# Altium PCB NRF24L01_PA.PcbDoc
Units mil, origin at the board's own origin, x right, y up, seen from the top; angles counter-clockwise.
Board outline 865.03 x 605.03 mil, 4 copper layers (Top Layer, Internal Plane 1, Signal Layer 1, Bottom Layer), stack 29.965 mil thick; 31 components, 23 nets, 111 pads, 55 vias.
Unrouted connection lines stored in the file: 1.
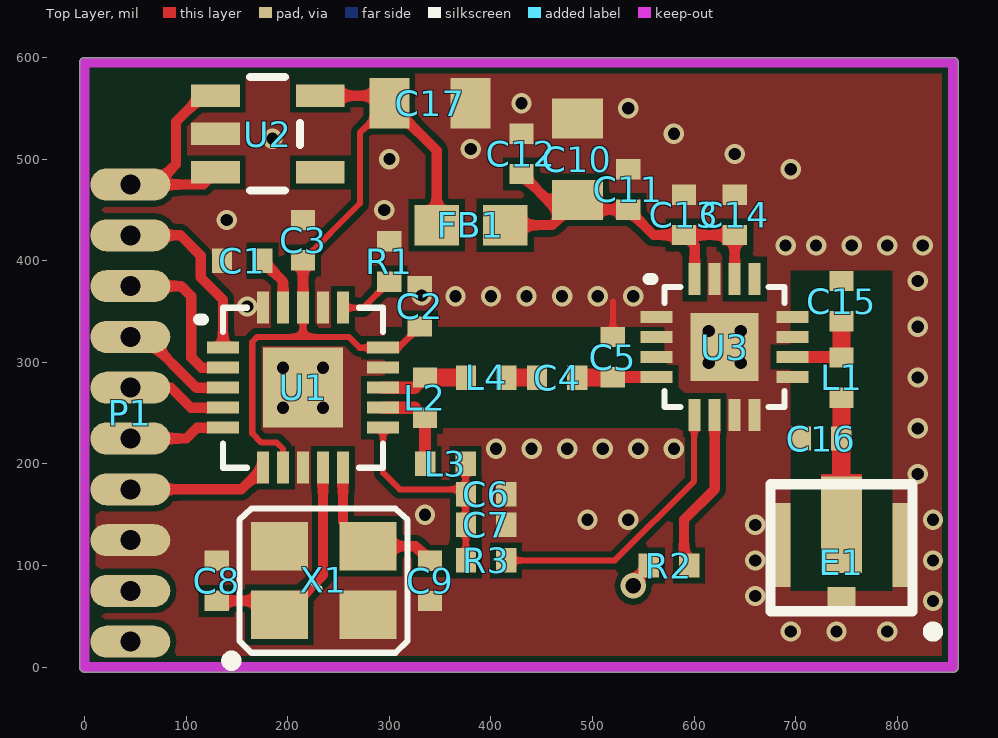
[diagram p0: Top Layer view]
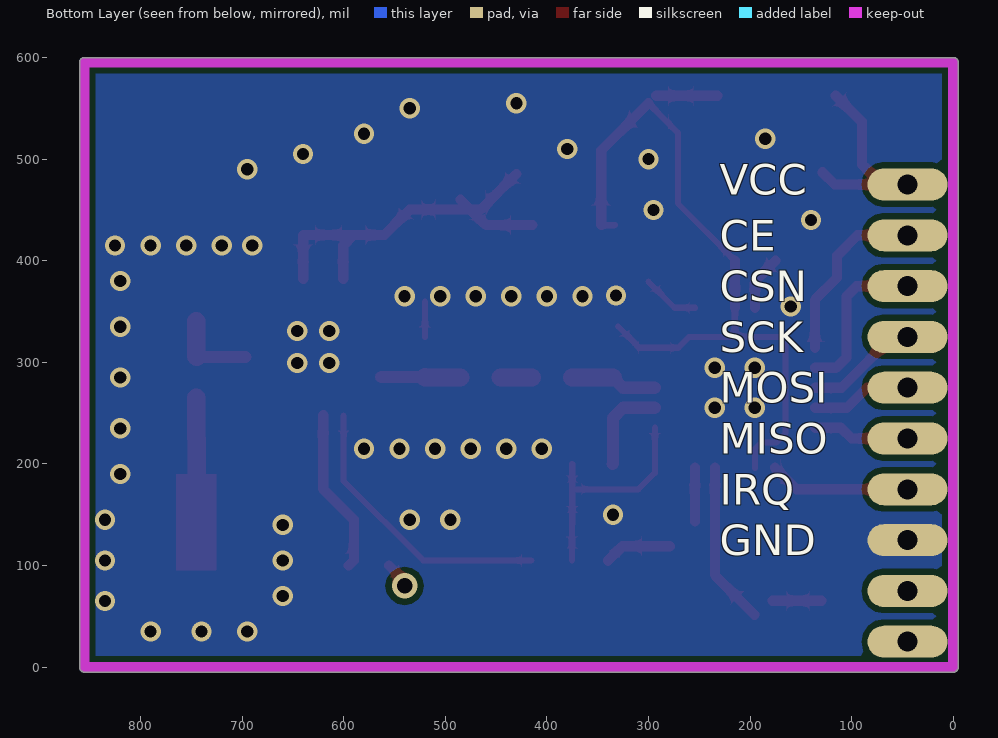
[diagram p1: Bottom Layer view, seen from below]
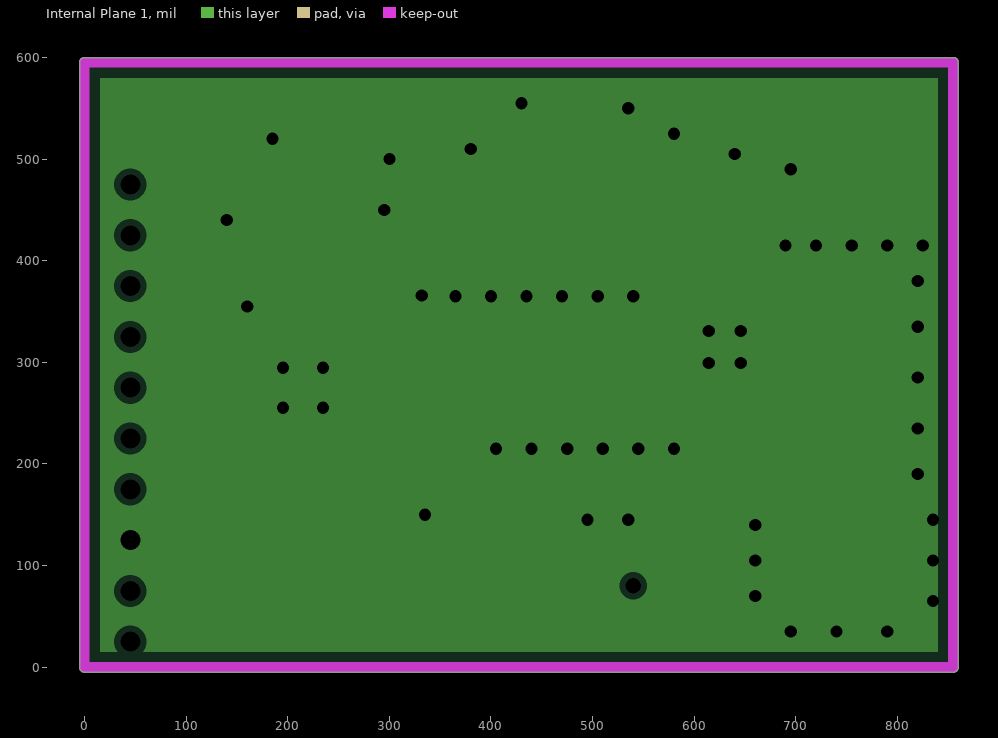
[diagram p2: Internal Plane 1, clearances drawn from the general rule]
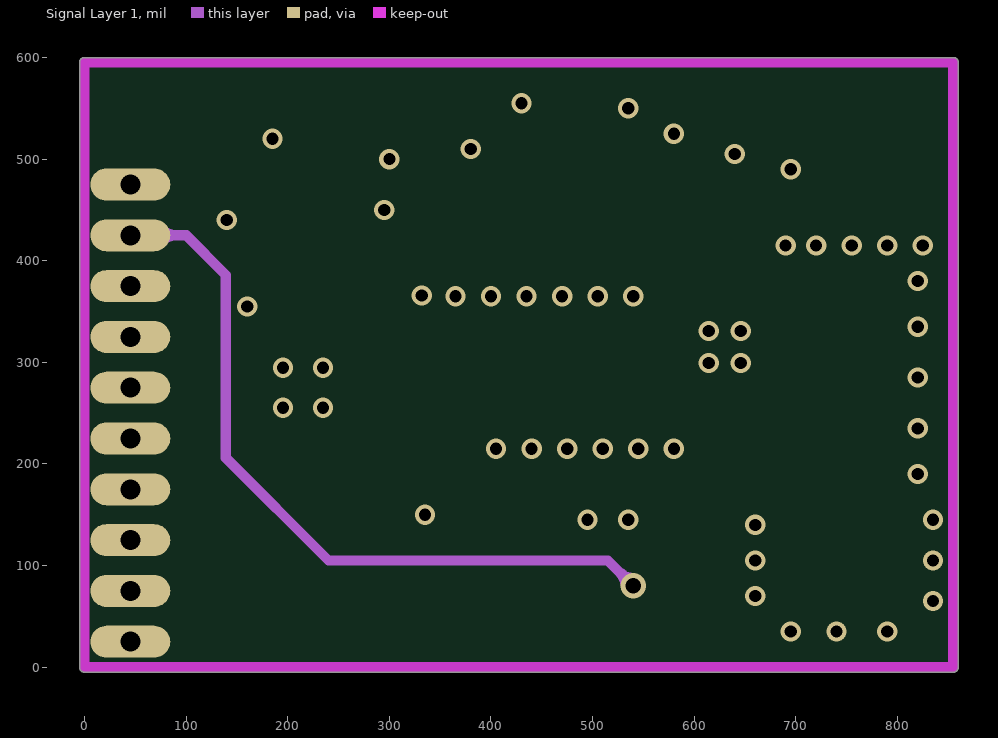
[diagram p3: Signal Layer 1]

## Layer stack, top to bottom
Top Solder: solder mask 0.4, Solder Resist, Dk 3.5
Top Layer: signal copper 1.4
Dielectric1: prepreg 5, FR-4, Dk 4.2
Internal Plane 1: plane copper 0.7087
Dielectric3: core 15.748, Dk 4.2
Signal Layer 1: signal copper 0.7087
Dielectric2: prepreg 5, Dk 4.2
Bottom Layer: signal copper 1.4
Bottom Solder: solder mask 0.4, Solder Resist, Dk 3.5

## Board outline
-5.02,0 ccw(c0,0) 0,-5.02 855,-5.02 ccw(c855,0) 860.02,0 860.02,595 ccw(c855,595) 855,600.01 0,600.01 ccw(c0,595) -5.02,595

## Design rules (kind name [scope] priority, off if disabled: settings)
Clearance [All] p1: gap=6 ignorepadtopadclearanceinfootprint=FALSE except(0: Arc-Hole Track-Hole SMDPad-Hole THPad-Hole Via-Hole Fill-Hole Poly-Hole Region-Hole Text-Hole)
FabricationTestpoint [(IsPad And (OnTopLayer Or OnBottomLayer))] p1: side=3 testpointundercomponent=TRUE minsize=40 maxsize=100 preferedsize=60 minholesize=0 maxholesize=40 preferedholesize=32 testpointgrid=1 allowsidetop=TRUE allowsidebottom=TRUE usegrid=TRUE gridtolerance=0.01
PlaneClearance [All] p1: clearance=6
PlaneConnect [All] p1: planeconnectstyle=NoConnect reliefexpansion=20 reliefentries=4 reliefconductorwidth=10 reliefairgap=10
PolygonConnect [All] p1: connectstyle=Direct reliefconductorwidth=10 reliefentries=4 polygonreliefangle="90 Angle" airgapwidth=10
RoomDefinition NRF24L01_PA [InComponentClass('NRF24L01_PA')] p1: confinementstyle=ConfineIn formatcopy=TRUE lockcomponents=FALSE outline 2765,-455 5630,-455 5630,-145 2765,-145
RoutingVias [All] p1: holewidth=28 width=50 viastyle="Through Hole" minholewidth=15 minwidth=20 maxholewidth=28 maxwidth=50
SolderMaskExpansion [All] p1 off: expansion=4
Width [All] p1: maxlimit=20 minlimit=6 preferedwidth=10
27 further rules are at their usual default settings.

## Components (designator, comment, footprint, x,y, rotation, side; value= is the part's Value field where it differs from the comment)
C1 "Cap" 0402 155,400 r0 top
C2 "Cap" 0402 330,355 r90 top
C3 "Cap" 0402 215,420 r90 top
C4 "Cap" 0402 465,285 r0 top
C5 "Cap" 0402 520,305 r90 top
C6 "Cap" 0402 395,170 r0 top
C7 "Cap" 0402 395,140 r0 top
C8 "Cap" 0402 130,85 r90 top
C9 "Cap" 0402 340,85 r270 top
C10 "Cap" 0805 485,500 r90 top
C11 "Cap" 0402 535,470 r90 top
C12 "Cap" 0402 430,505 r90 top
C13 "Cap" 0402 590,445 r90 top
C14 "Cap" 0402 640,445 r90 top
C15 "Cap" 0402 745,360 r90 top
C16 "Cap" 0402 725,225 r180 top
C17 "Cap" 0805 340,555 r0 top (schematic designator C8)
E1 "Antenna" IPEX 745,120 r180 top
FB1 "Res2" 0603 380,435 r0 top
L1 "Inductor" 0402 745,285 r270 top
L2 "Inductor" 0402 335,265 r90 top
L3 "Inductor" 0402 355,200 r0 top
L4 "Inductor" 0402 395,285 r0 top (schematic designator L1)
P1 "RFInf" RFInf 45,475 r0 top
R1 "Res2" 0402 300,399.37 r270 top
R2 "Res2" 0402 575,100 r0 top
R3 "Res2" 0402 395,105 r0 top
U1 "NRF24L01" NRF24L01 215,275 r0 top
U2 "LP5907" SOT23-5 180,525 r270 top
U3 "RFX2401C" RFX2401C 630,315 r0 top
X1 "16Mhz" OSCILLATOR-3.2X2.5 235,85 r0 top

## Footprints (in the part's own frame and the unit in brackets; to place one, negate y for a bottom-side part, rotate by r counter-clockwise, add the part's x,y. Pads: shape width x height; smd on the part's side, far side on the other; paste and mask are expansions set on the pad)
0402 [mil] "0402-RES"
  rect 20x24 smd: 1(-19.69,0) 2(20,0)
0603 [mil] "0603-RES"
  rect 44x40 smd: 1(-33.46,0) 2(34,0)
0805 [mil]
  rect 39.37x50 smd: 1(-40,0) 2(40,0)
  body extent -50,-30 50,30, height 31
IPEX [mil]
  rect 40x95 smd: 1(0,-20)
  rect 19.68x82.68 smd: 2(-60,0) 2(60,0)
  rect 27.56x27.56 smd: 2(0,55)
  Top Layer region: -20,-70 20,-70 20,25 -20,25
  silkscreen extent -95,-60 70,90
NRF24L01 [mm]
  rect 2x2 smd: 0(0,0)
  rect 0.8x0.3 smd: 1(-2,1) 2(-2,0.5) 3(-2,0) 4(-2,-0.5) 5(-2,-1) 11(2,-1) 12(2,-0.5) 13(2,0) 14(2,0.5) 15(2,1)
  rect 0.3x0.8 smd: 6(-1,-2) 7(-0.5,-2) 8(0,-2) 9(0.5,-2) 10(1,-2) 16(1,2) 17(0.5,2) 18(0,2) 19(-0.5,2) 20(-1,2)
  silkscreen extent -2.6,-2 2,2
OSCILLATOR-3.2X2.5 [mil] "OSCILLATOR-3.2X2.5"
  rect 56x48 smd: 1(-43.31,-33.46) 2(44,-33.46) 3(44,34) 4(-43.31,34)
  silkscreen extent -95,-83 83,71
RFInf [mm]
  oval 2x0.8 hole 0.5: 1(0,0) 2(0,-1.27) 3(0,-2.54) 4(0,-3.81) 5(0,-5.08) 6(0,-6.35) 7(0,-7.62) 8(0,-8.89) 9(0,-10.16) 10(0,-11.43)
RFX2401C [mm]
  rect 1.7x1.7 smd: 0(0,0)
  rect 0.8x0.3 smd: 1(-1.7,0.75) 2(-1.7,0.25) 3(-1.7,-0.25) 4(-1.7,-0.75) 9(1.7,-0.75) 10(1.7,-0.25) 11(1.7,0.25) 12(1.7,0.75)
  rect 0.3x0.8 smd: 5(-0.75,-1.7) 6(-0.25,-1.7) 7(0.25,-1.7) 8(0.75,-1.7) 13(0.75,1.7) 14(0.25,1.7) 15(-0.25,1.7) 16(-0.75,1.7)
  silkscreen extent -1.9,-1.5 1.5,1.7
SOT23-5 [mil] "SOT23-5"
  rect 22x48 smd: 1(-37.4,-51.19) 2(0,-51.19) 3(38,-51.19) 4(38,52) 5(-37.4,52)
  silkscreen extent -56,-17 56,32

## Part data
C1 C2 C3 C4 C5 C6 C7 C8 C9 C10 C11 C12 C13 C14 C15 C16 C17: "Capacitor"
E1: "Generic Antenna"
FB1 R1 R2 R3: "Resistor"
X1: library part OSCILLATOR-3.2X2.5, "Crystal Oscillator in 3.2x2.5 SMD"

## Via types
v1: diameter 20, hole 12, Top Layer to Bottom Layer, tented both sides, 53 vias
v2: diameter 20, hole 12.01, Top Layer to Bottom Layer, tented both sides, 1 vias
v3: diameter 25, hole 15, Top Layer to Bottom Layer, tented both sides, 1 vias

## Nets (pads, with @x,y where several pads share a name; then routed paths per layer and width w, separated by ;. In a path a pad name is that pad's centre, name@x,y a point inside that pad or via, vN(x,y) a via of type N, cw(c..) or ccw(c..) an arc to the next point about the centre after c; other vN are vias at no path point)
3.3NRF: C2.1 C3.1 C17.1 FB1.1 U1.7 U1.15 U1.18 U2.5 | length 813.2
  Top Layer w6: U1.7 195.31,214.68 188.99,221.01 173.99,221.01 165,230 165,320 170,325 210,325 ; U1.18 215,330 ; C3.1 271,456.32 271,526 C17.1 ; C2.1 309.06,314.37 U1.15 270.63,314.37 260,325 220,325 ; FB1.1@332.76,435 FB1.1 ; 210,325 220,325 ; 210,325 215,330 ; 215,330 220,325
  Top Layer w10: U1.18 C3.1 ; U2.5 C17.1@292.6,562.4 ; C17.1 346.54,508.46 FB1.1
3.3PA: C10.1 C11.1 C12.1 C13.1 C14.1 FB1.2 U3.14 U3.16 | length 407.2
  Top Layer w10: FB1.2 460,435 C10.1@475.31,450.32 ; C12.1 465,450.32 C10.1@475.31,450.32 ; C10.1 C10.1@475.31,450.32 ; U3.16 600.47,414.84 C13.1 ; U3.14 C14.1@639.84,425.16 ; C14.1 C13.1 ; C10.1@475.31,450.32 C11.1 560,425.32 C13.1
5V: P1.1 U2.1 U2.3 | length 195.1
  Top Layer w10: P1.1 P1.1@70,475 ; U2.1@115.66,562.4 90,536.74 90,495 P1.1@70,475 ; U2.3 116.81,475 P1.1@70,475
CE: P1.2 R2.1 U1.1 | length 947
  Top Layer w10: P1.2 94.31,425 114.31,405 114.31,383.44 136.26,361.5 U1.1 ; v3(540,80) 540,84.68 R2.1
  Signal Layer 1 w10: P1.2 100,425 139,386 139,206 240,105 515,105 v3(540,80)
CSN: P1.3 U1.2 | length 159.7
  Top Layer w10: P1.3 95,375 105,365 105,305 115.31,294.68 U1.2
GND: C1.1 C2.2 C3.2 C5.2 C6.2 C7.2 C8.2 C9.2 C10.2 C11.2 C12.2 C13.2 C14.2 C15.2 C16.2 C17.2 E1.2 P1.8 R1.1 U1.0 U1.8 U1.14 U1.17 U1.20 U2.2 U3.0 U3.1 U3.2 U3.3 U3.7 U3.8 U3.9 U3.11 U3.12 U3.15 X1.2 X1.4 | length 35
  Top Layer w6: C5.2 520,360
  other v1: 695,35 740,35 835,65 660,70 660,105 835,105 660,140 495,145 535,145 835,145 335,150 820,190 405,215 440,215 475,215 510,215 545,215 580,215 820,235 195.31,255.32 234.69,255.32 820,285 195.31,294.68 234.69,294.68 614.25,299.25 645.75,299.25 614.25,330.75 645.75,330.75 820,335 160,355 365,365 400,365 435,365 470,365 505,365 540,365 331.93,365.79 820,380 690,415 720,415 755,415 790,415 825,415 140,440 295,450 695,490 300,500 640,505 380,510 185,520 580,525 535,550 430,555
  other v2: 790,35
IRQ: P1.7 U1.6 | length 139.4
  Top Layer w10: P1.7 154.37,175 U1.6
MISO: P1.6 U1.5 | length 95.7
  Top Layer w10: P1.6 100,225 110.63,235.63 U1.5
MOSI: P1.5 U1.4 | length 99.4
  Top Layer w10: P1.5 85,275 104.69,255.32 U1.4
NetC1_2: C1.2 U1.19 | length 54.7
  Top Layer w10: C1.2 195.31,379.68 U1.19
NetC4_1: C4.1 L4.2 | length 30.3
  Top Layer w18: L4.2 C4.1
NetC4_2: C4.2 C5.1 U3.4 | length 78.3
  Top Layer w12: C5.1 520.16,285.47 U3.4
  Top Layer w18: C4.2 519.69,285 C5.1
NetC6_1: C6.1 C7.1 L3.2 R3.1 U1.11 | length 222.4
  Top Layer w6: U1.11 293.74,191.26 310,175 C6.1@370.31,175 ; C7.1@375,140.32 L3.2 ; R3.1 C7.1
NetC8_1: C8.1 U1.9 X1.1 | length 208.8
  Top Layer w10: C8.1 X1.1@177.91,65.32 ; X1.1@195.69,51.54 234.69,90.53 U1.9
NetC9_1: C9.1 U1.10 X1.3 | length 119.6
  Top Layer w10: 254.37,143.63 U1.10 ; X1.3 325.69,119 C9.1
NetC15_1: C15.1 L1.1 U3.10 | length 83.6
  Top Layer w12: U3.10 744.53,305.16 L1.1
  Top Layer w18: L1.1@744.53,305.16 745,305.63 C15.1
NetC16_1: C16.1 E1.1 L1.2 | length 125.3
  Top Layer w6: C16.1 C16.1@745,225.32
  Top Layer w18: C16.1 744.69,140.32 E1.1 ; C16.1@745,225.32 L1.2
NetL2_1: L2.1 L3.1 U1.12 | length 91.3
  Top Layer w6: L2.1 L2.1@335.31,245
  Top Layer w12: U1.12 325,255.32 L2.1 335,200.32 L3.1
NetL2_2: L2.2 L4.1 U1.13 | length 85.7
  Top Layer w12: U1.13 325,275 L2.2
  Top Layer w18: L2.2 L4.1
NetR1_2: R1.2 U1.16 | length 56.2
  Top Layer w6: U1.16 274.37,353.74 R1.2
NetR2_2: R2.2 U3.6 | length 162.6
  Top Layer w10: R2.2 590,105 590,145 620.16,175.16 U3.6
NetR3_2: R3.2 U3.5 | length 281.8
  Top Layer w6: R3.2 521.87,105 600,183.13 U3.5@600,247.6
SCK: P1.4 U1.3 | length 97
  Top Layer w10: P1.4@60,325 110,275 U1.3
pads on no net: P1.9 P1.10 U2.4 U3.13

## Polygon pours and split planes (outlines as drawn)
GND on Top Layer "Top Layer-No Net" (solid, remove dead copper, pour order 2): 0,595 855,595 855,0 0,0
GND on Bottom Layer "Top Layer-No Net" (solid, remove dead copper, pour order 4): 0,595 855,595 855,0 0,0
GND on Internal Plane 1 (split plane): 839.92,15.08 15.08,15.08 15.08,579.92 839.92,579.92

## Keep-outs
Keep-Out Layer:
  lines w10: 0,0 855,0 855,595 0,595 0,0

## Other copper
Top Layer:
  pour cut-out: 695,390 795,390 795,75 695,75
  pour cut-out: 295.28,335 570.87,335 570.87,289.58 625.44,235 295.28,235

## Silkscreen, mask and mechanical layers (free items; w line width, h text height)
Bottom Overlay:
  text "VCC" at 230,465 h30
  text "CE" at 230,410 h30
  text "CSN" at 230,360 h30
  text "SCK" at 230,310 h30
  text "MOSI" at 230,260 h30
  text "MISO" at 230,210 h30
  text "IRQ" at 230,160 h30
  text "GND" at 230,110 h30